# Altium PCB bottom board.PcbDoc
Units mm, origin at the board's own origin, x right, y up, seen from the top; angles counter-clockwise.
Board outline 190.66 x 105.54 mm, 2 copper layers (Top Layer, Bottom Layer); 93 components, 66 nets, 307 pads, 247 vias.
Unrouted connection lines stored in the file: 2.
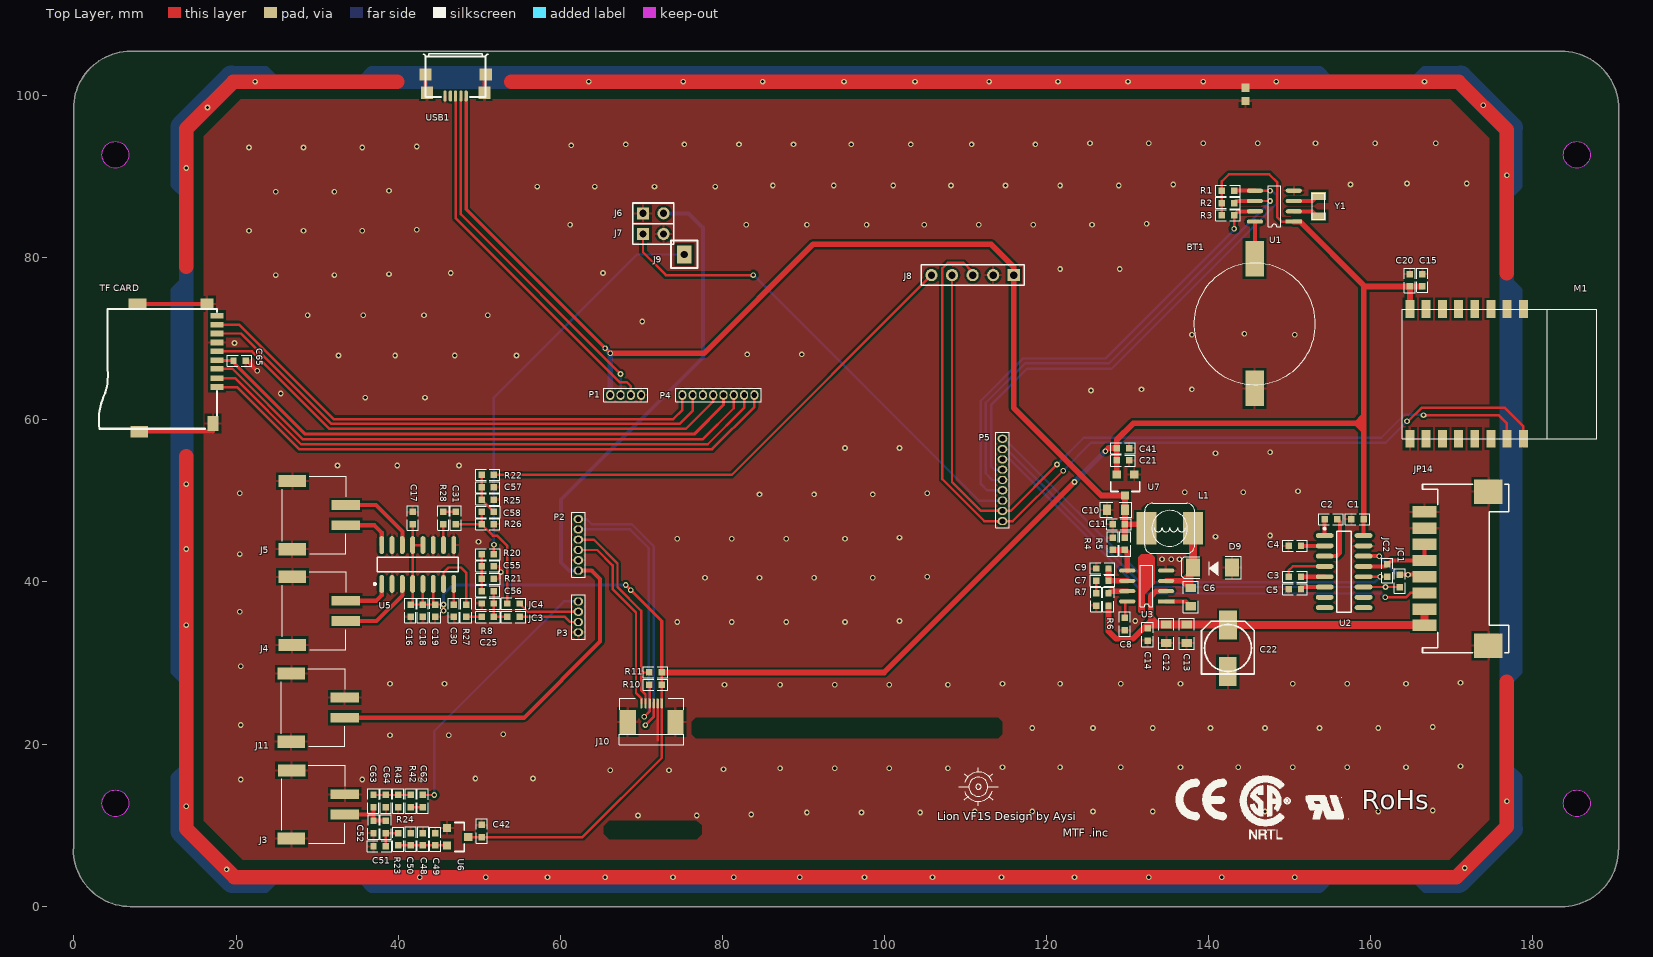
[diagram p0: Top Layer view]
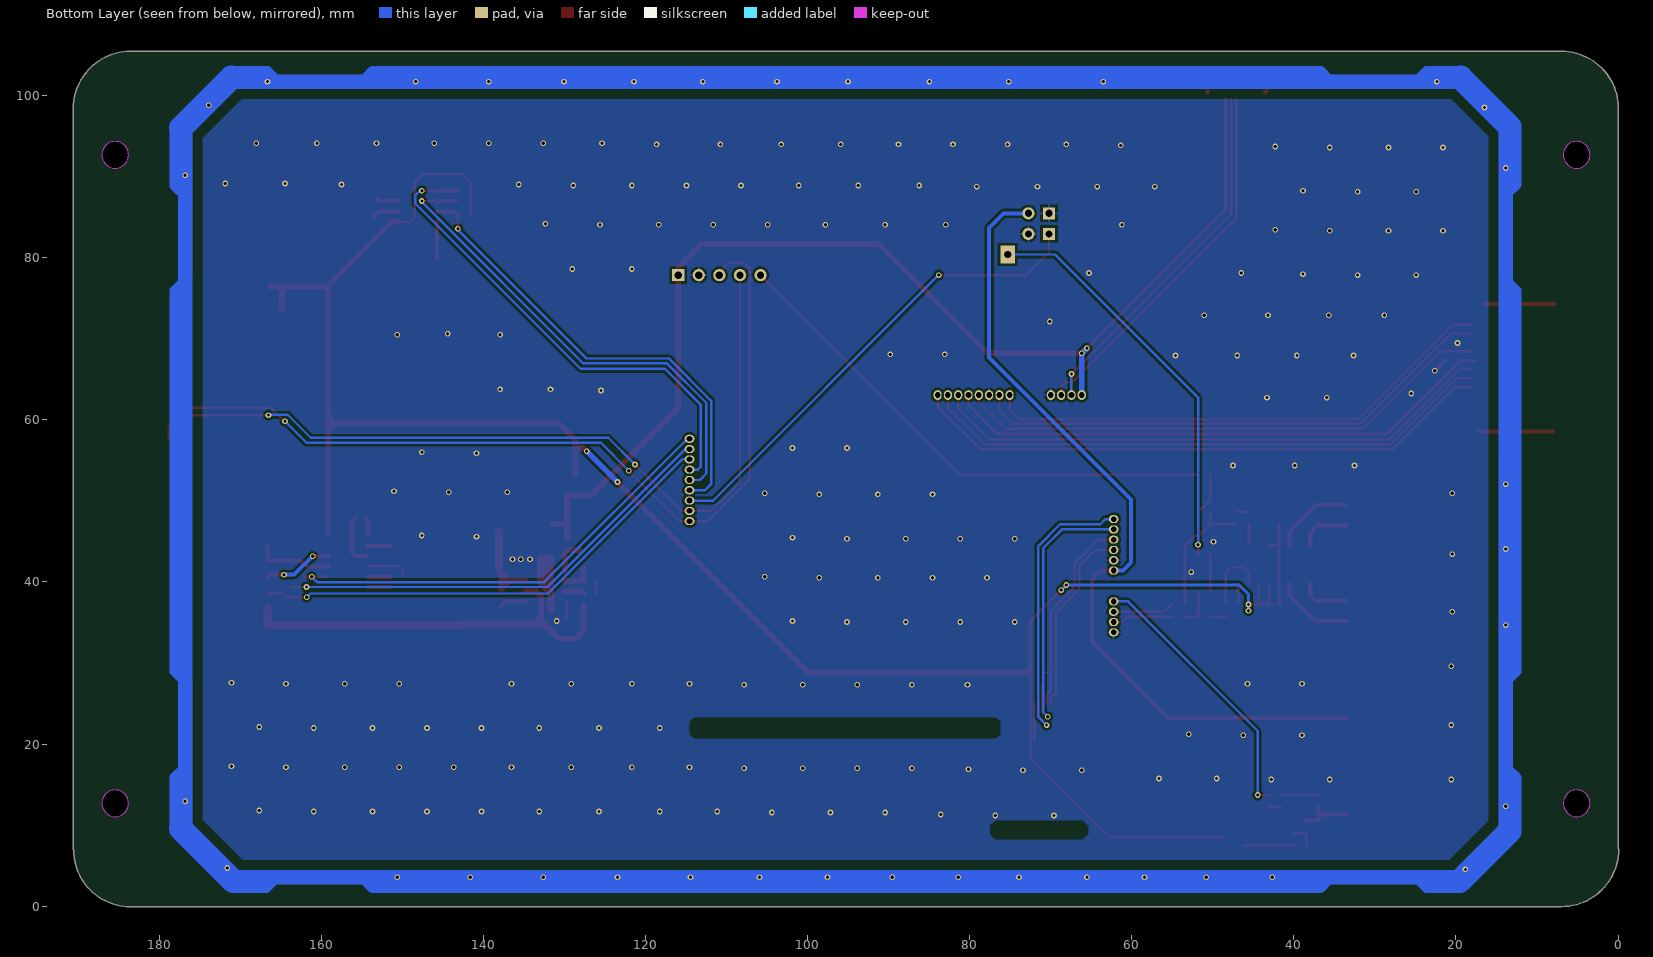
[diagram p1: Bottom Layer view, seen from below]

## Layer stack, top to bottom
Top Layer: signal copper 0.0356
Dielectric: core 0.32, FR-4, Dk 4.8
Bottom Layer: signal copper 0.0356

## Board outline
6.963,-0.052 cw(c6.985,7.012) -0.079,7.012 cw(c-0.015,7.012) -0.052,7.064 -0.052,98.4 cw(c7.012,98.4) 7.012,105.464 cw(c7.012,105.4) 7.044,105.455 183.487,105.455 cw(c183.515,105.398) 183.515,105.462 cw(c183.515,98.398) 190.579,98.398 cw(c190.515,98.398) 190.576,98.379 190.576,7 cw(c190.512,7) 190.552,6.95 cw(c183.488,6.985) 183.488,-0.079 cw(c183.488,-0.015) 183.46,-0.072 7.01,-0.072 cw(c7.01,-0.009)
cut-out: 5.112,91.042 cw(c5.112,92.692) 3.462,92.692 cw(c5.112,92.692) 5.112,94.342 cw(c5.112,92.692) 6.762,92.692 cw(c5.112,92.692)
cut-out: 5.112,11.042 cw(c5.112,12.692) 3.462,12.692 cw(c5.112,12.692) 5.112,14.342 cw(c5.112,12.692) 6.762,12.692 cw(c5.112,12.692)
cut-out: 185.412,11.042 cw(c185.412,12.692) 183.762,12.692 cw(c185.412,12.692) 185.412,14.342 cw(c185.412,12.692) 187.062,12.692 cw(c185.412,12.692)
cut-out: 185.412,91.042 cw(c185.412,92.692) 183.762,92.692 cw(c185.412,92.692) 185.412,94.342 cw(c185.412,92.692) 187.062,92.692 cw(c185.412,92.692)

## Design rules (kind name [scope] priority, off if disabled: settings)
Clearance [All] p1: gap=0.3
PolygonConnect PolygonConnect_1 [IsVia] p1: connectstyle=Direct reliefconductorwidth=0.254 reliefentries=4 polygonreliefangle="90 Angle"
PolygonConnect [All] p2: connectstyle=Relief reliefconductorwidth=0.3 reliefentries=4 polygonreliefangle="90 Angle"
RoutingVias [All] p1: holewidth=0.4 width=0.7 viastyle="Through Hole" minholewidth=0.4 minwidth=0.7 maxholewidth=0.711 maxwidth=1.27
SilkToSilkClearance [All] p1: silktosilkclearance=0
SilkscreenOverComponentPads [IsPad] p1: minsilkscreentomaskgap=0
SolderMaskExpansion [All] p1: expansion=0.102
TestPointUsage [All] p1: valid=0 allowmultiple=FALSE
Testpoint [(IsPad And (OnTopLayer Or OnBottomLayer))] p1: side=3 testpointundercomponent=TRUE minsize=1.016 maxsize=2.54 preferedsize=1.524 minholesize=0 maxholesize=1.016 preferedholesize=0.813 testpointgrid=0.025 style=297 order=0123456789
Width [All] p1: maxlimit=3 minlimit=0.254 preferedwidth=0.3
22 further rules are at their usual default settings.

## Components (designator, comment, footprint, x,y, rotation, side; value= is the part's Value field where it differs from the comment)
BT1 "Battery" CR1220 145.669,79.883 r0 top
C1 "100nF" 0603 157.607,47.752 r0 top
C2 "100nF" 0603 154.305,47.752 r0 top
C3 "100nF" 0603 149.86,40.64 r0 top
C4 "100nF" 0603 151.384,44.45 r180 top
C5 "100nF" 0603 149.86,39.116 r0 top
C6 "10nF" 0805 137.795,39.243 r270 top
C7 "3.9nF" 0603 127.635,40.132 r180 top
C8 "100nF" 0603 129.667,35.56 r270 top
C9 "NC" 0603 127.635,41.656 r180 top
C10 "22uF" 0805 129.667,48.895 r180 top
C11 "100nF" 0603 129.667,47.117 r180 top
C12 "22uF" 0805 134.767,34.712 r270 top
C13 "22uF" 0805 137.273,34.712 r270 top
C14 "100nF" 0603 132.461,34.29 r270 top
C15 "100nF" 0603 166.351,76.453 r90 top
C16 "10uF" 0603 41.529,37.211 r270 top
C17 "10uF" 0603 41.783,47.117 r90 top
C18 "10uF" 0603 43.053,37.211 r270 top
C19 "100nF" 0603 44.577,35.687 r90 top
C20 "10uF" 0603 164.827,77.977 r270 top
C21 "10uF" 0603 128.651,54.991 r0 top
C22 "100uF/35V" CAP_SMD_6.5MM 142.367,34.671 r90 top
C25 "1uF" 0603 50.292,35.687 r0 top
C30 "1uF" 0603 46.863,37.211 r270 top
C31 "1uF" 0603 47.117,48.64 r270 top
C41 "100nF" 0603 128.651,56.515 r0 top
C42 "100nF" 0603 50.292,8.509 r90 top
C48 "100nF" 0603 43.053,7.493 r90 top
C49 "10uF" 0603 44.577,9.017 r270 top
C50 "4.7uF" 0603 41.529,7.493 r90 top
C51 "4.7uF" 0603 38.481,7.366 r180 top
C52 "3.3nF" 0603 36.957,9.017 r90 top
C55 "33nf" 0603 51.816,41.91 r180 top
C56 "10uf" 0603 51.816,38.862 r180 top
C57 "33nf" 0603 51.816,51.689 r180 top
C58 "10uf" 0603 50.292,48.641 r0 top
C62 "100nF" 0603 43.053,13.716 r270 top
C63 "100nF" 0603 36.957,13.716 r270 top
C64 "1nF" 0603 38.481,12.192 r90 top
C65 "100nF" 0603 19.685,67.31 r0 top
D9 "SS34" SMA 142.875,41.783 r0 top
J3 "" 2PIN2.54-SMD 33.421,11.295 r90 top
J4 "" 2PIN2.54-SMD 33.528,35.179 r90 top
J5 "" 2PIN2.54-SMD 33.528,46.99 r90 top
J6 "Header 2" HDR1X2 70.206,85.471 r0 top locked
J7 "Header 2" HDR1X2 70.206,82.931 r0 top locked
J8 "Header 5" HDR1X5 115.951,77.851 r180 top locked
J9 "1PIN" 1PIN 75.311,80.391 r0 top locked
J10 "Header 7" FPC-6PIN 72.517,25.019 r180 top
J11 "" 2PIN2.54-SMD 33.401,23.241 r90 top
JC1 "0R" 0603 163.576,40.894 r270 top
JC2 "0R" 0603 162.052,42.164 r270 top
JC3 "0R" 0603 53.467,35.687 r0 top
JC4 "0R" 0603 53.467,37.338 r0 top
JP14 "DW-2.0/8P" DW2.0-8P-SMD 166.624,48.641 r90 top
L1 "10uH" LS8 138.049,46.609 r180 top
M1 "ESP-12S" ESP-12S 178.816,73.66 r270 top
P1 "USB" 4PIN1.27 66.167,63.055 r0 top locked
P2 "Header 6" 6PIN1.27 62.23,41.402 r90 top locked
P3 "MM" 4PIN1.27 62.23,33.782 r90 top locked
P4 "SD" 8PIN1.27 83.947,63.055 r180 top locked
P5 "Header 9" 9PIN1.27 114.554,47.498 r90 top locked
R1 "10K" 0603 141.605,88.265 r0 top
R2 "10K" 0603 143.129,86.741 r180 top
R3 "10K" 0603 143.129,85.217 r180 top
R4 "6.8K" 0603 128.143,43.942 r90 top
R5 "30K" 0603 129.667,43.942 r90 top
R6 "100K" 0603 127.635,38.608 r270 top
R7 "6.8K" 0603 126.111,37.084 r90 top
R8 "NC" 0603 50.292,37.338 r0 top
R10 "10K" 0603 72.517,27.305 r180 top
R11 "10K" 0603 72.517,28.829 r180 top
R20 "270R" 0603 50.292,43.434 r0 top
R21 "150R" 0603 50.292,40.386 r0 top
R22 "270R" 0603 51.816,53.213 r180 top
R23 "2K" 0603 40.005,9.017 r270 top
R24 "6.2K" 0603 38.481,10.541 r270 top
R25 "150R" 0603 51.816,50.165 r180 top
R26 "NC" 0603 51.816,47.117 r180 top
R27 "10K" 0603 48.387,37.211 r270 top
R28 "10K" 0603 45.574,47.116 r90 top
R42 "3.6K" 0603 41.529,12.192 r90 top
R43 "1K" 0603 40.005,12.192 r90 top
"TF CARD" "TF-15×15" SD_MICRO 17.78,66.294 r90 top
U1 "DS1302" SOP-8 150.495,84.455 r90 top
U2 "SP3232EEY-L/TR" SOIC-16 154.305,45.72 r270 top
U3 "MP2307" SOP-8 134.747,37.592 r90 top
U5 "PAM8403" SOIC-16 37.973,39.751 r0 top
U6 "XC6206-3.0V" SOT-23-3 48.641,8.509 r180 top
U7 "XC6206-3.3V" SOT-23-3 129.667,50.673 r90 top
USB1 "micro USBFemale" USB_MICRO 48.387,99.949 r180 top
Y1 "32.768K" SMD-3215 153.543,85.09 r90 top

## Footprints (in the part's own frame and the unit in brackets; to place one, negate y for a bottom-side part, rotate by r counter-clockwise, add the part's x,y. Pads: shape width x height; smd on the part's side, far side on the other; paste and mask are expansions set on the pad)
1PIN [mm]
  rect 1.8x2.2 hole 0.9: 1(0,0)
  silkscreen extent -1.68,-1.68 1.63,1.72
2PIN2.54-SMD [mm]
  rect 1.5x3.4 smd: 0(-2.95,6.6) 0(5.45,6.575)
  rect 1.2x3.5 smd: 1(0,0) 2(2.5,0)
  silkscreen extent -3.52,-0.05 6.07,7.8
4PIN1.27 [mm] "Connector; Header; 4 Position"
  oval 1x1.2 hole 0.7: 1(0,0) 2(1.27,0) 3(2.54,0) 4(3.81,0)
  silkscreen extent -0.82,-0.82 4.62,0.82
6PIN1.27 [mm] "Connector; Header; 6 Position"
  oval 1x1.2 hole 0.7: 1(0,0) 2(1.27,0) 3(2.54,0) 4(3.81,0) 5(5.08,0) 6(6.35,0)
  silkscreen extent -0.82,-0.82 7.17,0.82
8PIN1.27 [mm] "Connector; Header; 8 Position"
  oval 1x1.2 hole 0.7: 1(0,0) 2(1.27,0) 3(2.54,0) 4(3.81,0) 5(5.08,0) 6(6.35,0) 7(7.62,0) 8(8.89,0)
  silkscreen extent -0.82,-0.82 9.72,0.82
9PIN1.27 [mm] "Connector; Header; 9 Position"
  oval 1x1.2 hole 0.7: 1(0,0) 2(1.27,0) 3(2.54,0) 4(3.81,0) 5(5.08,0) 6(6.35,0) 7(7.62,0) 8(8.89,0) 9(10.16,0)
  silkscreen extent -0.82,-0.82 10.97,0.82
0603 [mm]
  rect 0.8x0.8 smd: 1(0,0) 2(1.524,0)
  silkscreen extent -0.74,-0.7 2.27,0.68, body extent 0,-0.4 1.53,0.4, height 1
0805 [mm]
  rect 1x1.3 smd: 1(-0.02,-0.002) 2(2.241,-0.002)
  silkscreen extent -0.81,-0.93 3.03,0.94, body extent 0,-0.55 2.25,0.55, height 1
CAP_SMD_6.5MM [mm]
  rect 3.6x2.2 smd: 1(0,0) 2(-5.73,0.01)
  silkscreen extent -6.02,-3.26 0.48,3.24, body extent -6.05,-3.22 0.44,3.25, height 6
CR1220 [mm]
  rect 2.3x4.4 smd: 1(0,0) 2(0,-16)
  silkscreen extent -7.5,-15.55 7.5,-0.55
DW2.0-8P-SMD [mm]
  rect 3x3.5 smd: 0(-16.5,-7.881) 0(2.5,-7.881)
  rect 1.4x3 smd: 1(0,0) 2(-2,0) 3(-4,0) 4(-6,0) 5(-8,0) 6(-10,0) 7(-12,0) 8(-14,0)
  silkscreen extent -17.4,-10.38 3.43,0.25
ESP-12S [mm]
  rect 2.2x1.1 smd: 1(0,0) 2(0,-2) 3(0,-4) 4(0,-6) 5(0,-8) 6(0,-10) 7(0,-12) 8(0,-14) 9(16,-14) 10(16,-12) 11(16,-10) 12(16,-8) 13(16,-6) 14(16,-4) 15(16,-2) 16(16,0)
  silkscreen extent 0,-14.95 16,9.05
FPC-6PIN [mm]
  oval 0.3x1.25 smd: 1(0,0) 2(0.5,0) 3(1,0) 4(1.5,0) 5(2,0) 6(2.5,0)
  rect 2x3 smd: 7(-1.7,2.3) 7(4.2,2.3)
  silkscreen extent -2.7,-0.63 5.23,5.13
HDR1X2 [mm] "Connector; Header; 2 Position"
  rect 1.5x1.5 hole 0.9: 1(0,0)
  round 1.5 hole 0.9: 2(2.54,0)
  silkscreen extent -1.27,-1.27 3.81,1.27
HDR1X5 [mm] "Connector; Header; 5 Position"
  rect 1.5x1.5 hole 0.9: 1(0,0)
  round 1.5 hole 0.9: 2(2.54,0) 3(5.08,0) 4(7.62,0) 5(10.16,0)
  silkscreen extent -1.27,-1.27 11.43,1.27
LS8 [mm]
  rect 2.5x4 smd: 1(0,0) 2(5.74,0)
  silkscreen extent -0.23,-3.1 5.97,3.1
SD_MICRO [mm]
  rect 0.7x1.6 smd: 1(-2.25,0.127) 2(-1.151,0.127) 3(0,0.127) 4(1.049,0.127) 5(2.149,0.127) 6(3.251,0.127) 7(4.351,0.127) 8(5.451,0.127) 9(6.551,0.127)
  rect 1.4x1.6 smd: 10(8.001,1.377)
  rect 1.4x2.2 smd: 11(8.001,9.926) 13(-7.75,9.728)
  rect 1.8x1.4 smd: 12(-6.749,0.627)
  silkscreen extent -7.4,0.13 7.4,14.7, body extent -7.45,0.08 7.4,14.6, height 1.5
SMA [mm]
  rect 1.7x2.2 smd: 1(0,0) 2(-4.82,0)
  silkscreen extent -6.22,-1.39 1.15,1.4, body extent -4.82,-1.2 0,1.2, height 2
SMD-3215 [mm]
  rect 1x1.8 smd: 1(0,0) 2(2.5,0)
  silkscreen extent -0.35,-0.75 2.85,0.75
SOIC-16 [mm]
  oval 0.6x2.2 smd: 1(0,0) 2(1.27,0) 3(2.54,0) 4(3.81,0) 5(5.08,0) 6(6.35,0) 7(7.62,0) 8(8.89,0) 9(8.89,4.8) 10(7.62,4.8) 11(6.35,4.8) 12(5.08,4.8) 13(3.81,4.8) 14(2.54,4.8) 15(1.27,4.8) 16(0,4.8)
  silkscreen extent -0.97,-0.12 9.45,3.3, body extent -0.51,0.45 9.4,4.35, height 1.75
SOP-8 [mm]
  rect 0.51x2 smd: 1(0,0)
  oval 0.51x2 smd: 2(1.27,0) 3(2.54,0) 4(3.81,0) 5(3.81,4.8) 6(2.54,4.8) 7(1.27,4.8) 8(0,4.8)
  silkscreen extent -0.64,1.64 4.44,3.17, body extent -0.63,0.67 4.47,4.13, height 1.5
SOT-23-3 [mm]
  rect 1x1 smd: 1(0,0) 2(2.598,-1.143) 3(2.598,1.016)
  silkscreen extent 0.49,-1.82 1.66,1.75, body extent 0.48,-1.8 2.07,1.75, height 1
USB_MICRO [mm]
  rect 1.5x1.5 smd: 0(-2.423,-2.659) 0(-2.248,-0.409) 0(4.827,-0.409) 0(5.002,-2.634)
  oval 0.4x1.35 smd: 1(0,0) 2(0.65,0) 3(1.3,0) 4(1.95,0) 5(2.6,0)
  silkscreen extent -2.7,-5.2 5.3,0.15

## Part data
BT1: "Multicell Battery"
C1 C2 C3 C4 C5 C6 C7 C8 C9 C10 C11 C12 C13 C14 C15 C16 C17 C18 C19 C20 C21 C25 C30 C31 C50 C51 C52 C62 C63 C64 C65: library part CAP, "Capacitor"
C22: library part ELECTRO1_W
C41 C42 C48 C49: library part Cap, "Capacitor"
C55 C56 C57 C58: library part CAP_W
D9: library part Diode, "Diode"
J3 J4 J5 J11: library part CON2, "Connector"
J6 J7: "Header, 2-Pin"
J8: "Header, 5-Pin"
J10: "Header, 7-Pin"
L1: library part Inductor, "Inductor"
P1 P3: library part "Header 4", "Header, 4-Pin"
P2: "Header, 6-Pin"
P4: library part "Header 8", "Header, 8-Pin"
P5: "Header, 9-Pin"
R1 R2 R3 R4 R5 R6 R7 R10 R11 R23 R24 R27 R28 R42 R43: library part RES2
R8 R20 R21 R22 R25 R26: library part Res2, "Resistor"
U2: "RS232"
U5: library part SC8403
U6 U7: library part XC6206
Y1: library part XTAL, "Crystal Oscillator"

## Free pads (board coordinates)
  rect 1x1 smd: 0(144.526,99.314) 1(144.526,100.965)

## Via types
v1: diameter 0.7, hole 0.4, Top Layer to Bottom Layer, tented both sides, 247 vias

## Nets (pads, with @x,y where several pads share a name; then routed paths per layer and width w, separated by ;. In a path a pad name is that pad's centre, name@x,y a point inside that pad or via, vN(x,y) a via of type N, cw(c..) or ccw(c..) an arc to the next point about the centre after c; other vN are vias at no path point)
3V3: C1.2 C15.1 C16.1 C17.1 C18.1 C19.2 C20.2 C21.1 C41.1 C42.1 J10.1 M1.8 R1.1 R2.2 R3.2 R10.1 R11.1 U1.1 U2.16 U5.4 U5.5 U5.6 U5.12 U5.13 U6.1 U7.3 | length 273.9
  Top Layer w0.3: C16.1 C19.2 v1(45.593,37.211) ; C16.1@41.783,37.465 U5.4 U5.13 ; C17.1 U5.13 ; C18.1 U5.5 ; U5.12 U5.13 ; C19.2@44.323,37.465 U5.6 ; U6.1 C42.1@50.165,8.509 ; C42.1 62.738,8.509 72.517,18.288 J10.1 R10.1 R11.1 ; v1@68.072,39.497 v1(68.072,39.624) ; R3.2 R2.2 R1.1 141.605,89.408 142.494,90.297 147.447,90.297 148.463,89.281 148.463,84.963 148.971,84.455 U1.1
  Top Layer w0.4: v1(45.593,36.449) v1(45.593,37.211) ; v1(68.072,39.624) 72.517,35.179 R11.1
  Top Layer w0.5: U2.16 C1.2@159.105,47.472
  Top Layer w0.7: R11.1 99.949,28.829 v1(123.444,52.324) ; v1(127.254,56.134) 127.635,56.515 C41.1 ; U7.3 128.651,56.134 128.651,57.531 130.683,59.563 158.242,59.563 ; U1.1 151.257,84.455 159.131,76.581 C1.2 ; 159.131,58.674 158.242,59.563 ; 159.131,59.563 158.242,59.563 ; 159.131,60.452 158.242,59.563 ; 159.385,76.454 161.417,76.454 C15.1@166.351,76.454 ; M1.8@164.827,73.671 C20.2
  Bottom Layer w0.4: v1(45.593,36.449) 45.593,38.481 46.736,39.624 59.309,39.624 ; 58.801,39.624 58.813,39.624 ; 59.321,39.636 59.309,39.624 ; v1(68.707,38.989) v1(68.072,39.624) 59.309,39.624
  Bottom Layer w0.7: v1(123.444,52.324) v1(127.254,56.134)
5V: C10.1 C11.1 J8.1 L1.2 P1.1 R5.2 U7.1 USB1.1 | length 143.7
  Top Layer w0.4: USB1.1@48.387,99.568 48.387,98.044 48.387,85.979 v1(65.532,68.834) v1(66.167,68.199)
  Top Layer w0.7: v1(66.167,68.199) 77.724,68.199 91.186,81.661 113.157,81.661 115.951,78.867 115.951,61.468 126.746,50.673 U7.1 ; R5.2 C11.1 ; U7.1@129.667,50.546 C11.1 ; L1.2@131.42,47.117 C11.1
  Bottom Layer w0.7: v1(65.532,68.834) v1(66.167,68.199) P1.1
BUSY: JP14.6 P5.7 | length 59.9
  Top Layer w0.3: v1(161.777,38.121) 161.798,38.1 164.338,38.1 164.879,38.641 JP14.6 JP14.6@166.21,38.227
  Bottom Layer w0.3: P5.7 115.483,55.118 132.031,38.57 161.328,38.57 v1(161.777,38.121)
CTP_INT: J10.6 P2.3 | length 23.5
  Top Layer w0.3: P2.3 62.404,43.942 64.556,43.942 66.456,42.042 66.456,39.889 66.456,39.121 69.342,36.235 69.342,27.432 69.342,26.289 70.017,25.614 J10.6
CTP_RET: J10.3 P2.6 | length 36.3
  Top Layer w0.3: v1(70.501,22.336) 71.517,23.352 J10.3
  Bottom Layer w0.3: P2.6 63.246,47.752 63.881,47.117 68.834,47.117 71.517,44.434 71.517,23.352 v1(70.501,22.336)
CTP_SCL: J10.4 P2.5 R10.2 | length 34.9
  Top Layer w0.3: v1(70.358,23.368) 71.017,24.027 J10.4 71.017,27.281 R10.2
  Bottom Layer w0.3: P2.5 68.615,46.482 70.917,44.18 70.917,23.927 v1(70.358,23.368)
CTP_SDA: J10.5 P2.4 R11.2 | length 26.5
  Top Layer w0.3: P2.4 64.135,45.212 67.056,42.291 67.056,39.37 69.977,36.449 69.977,27.813 69.977,26.67 70.517,26.13 J10.5 ; 69.977,28.575 70.231,28.829 ; 69.977,28.829 70.231,28.829 ; 69.977,29.083 70.231,28.829 ; R11.2 70.231,28.829
CVBS: J6.2 J11.1 P2.1 | length 102.9
  Top Layer w0.5: J11.1 53.213,23.241 55.499,23.241 64.897,32.639 64.897,40.386 63.881,41.402 P2.1
  Bottom Layer w0.5: P2.1 61.087,41.402 60.071,42.418 60.071,50.165 64.897,54.991 77.597,67.691 77.597,83.693 75.819,85.471 J6.2
GND: "TF CARD.6" "TF CARD.10" "TF CARD.11" "TF CARD.12" "TF CARD.13" BT1.2 C1.1 C4.2 C5.1 C8.2 C9.2 C10.2 C11.2 C12.2 C13.2 C14.2 C15.2 C16.2 C17.2 C18.2 C19.1 C20.1 C21.2 C22.2 C30.2 C41.2 C42.2 C48.2 C49.1 C50.2 C51.2 C52.1 C55.1 C57.1 C64.1 C65.2 D9.1 J3.0 J3.2 J4.0 J5.0 J6.1 J7.2 J8.2 J10.2 J10.7 J11.0 J11.2 JP14.0 JP14.1 JP14.2 M1.9 P1.4 P2.2 P3.1 P4.6 pad.0 R4.2 R7.1 R8.1 R21.2 R25.1 R26.1 R43.1 U1.4 U2.15 U3.4 U5.2 U5.9 U5.11 U5.15 U6.2 U7.2 USB1.0 USB1.5 | length 29.9
  Top Layer w0.3: 52.516,40.536 52.516,41.76 ; 72.009,20.447 72.017,20.455 J10.2
  Top Layer w0.5: 7.854,74.295 11.938,74.295 16.403,74.295 ; 8.052,58.544 12.065,58.544 17.142,58.544 17.145,58.547 ; C65.2@21.336,67.31 v1(22.606,66.04) ; USB1.0@43.385,102.583 43.385,100.533 USB1.0@43.56,100.358 ; USB1.0@50.635,100.358 50.635,102.433 USB1.0@50.81,102.608
  other v1: 69.596,11.176 76.835,11.176 83.566,11.303 90.424,11.557 97.155,11.557 104.394,11.557 111.125,11.684 118.237,11.684 125.73,11.684 133.096,11.684 140.208,11.684 146.939,11.684 153.67,11.684 160.909,11.684 167.64,11.811 20.574,15.621 35.56,15.621 42.799,15.621 49.53,15.748 56.642,15.748 66.167,16.764 73.406,16.764 80.137,16.891 87.122,17.018 93.853,17.018 100.584,17.018 107.823,17.018 114.554,17.145 121.666,17.145 129.159,17.145 136.525,17.145 143.637,17.145 150.368,17.145 157.099,17.145 164.338,17.145 171.069,17.272 38.989,21.082 46.228,21.082 52.959,21.209 118.237,21.971 125.73,21.971 133.096,21.971 140.208,21.971 146.939,21.971 153.67,21.971 160.909,21.971 167.64,22.098 20.574,22.352 80.264,27.305 87.122,27.305 93.853,27.305 100.584,27.305 107.823,27.305 38.989,27.432 45.72,27.432 114.554,27.432 121.666,27.432 129.159,27.432 136.525,27.432 150.368,27.432 157.099,27.432 164.338,27.432 171.069,27.559 20.574,29.591 74.422,35.052 81.153,35.052 87.884,35.052 95.123,35.052 101.854,35.179 130.937,35.179 20.447,36.322 77.851,40.513 84.582,40.513 91.313,40.513 98.552,40.513 105.283,40.64 52.643,41.21 134.239,42.799 135.382,42.799 136.398,42.799 20.447,43.434 49.911,44.958 74.422,45.339 81.153,45.339 87.884,45.339 95.123,45.339 101.854,45.466 140.843,45.593 147.574,45.72 84.582,50.8 91.313,50.8 98.552,50.8 20.447,50.927 105.283,50.927 137.033,51.054 144.272,51.054 151.003,51.181 32.512,54.356 39.878,54.356 47.498,54.356 140.843,55.88 147.574,56.007 95.123,56.515 101.854,56.515 35.941,62.738 43.307,62.738 25.527,63.246 125.476,63.627 131.699,63.754 137.922,63.754 32.639,67.945 39.624,67.945 46.99,67.945 54.61,67.945 83.058,68.072 89.789,68.072 19.812,69.469 137.922,70.485 150.622,70.485 144.399,70.612 70.104,72.136 28.829,72.898 35.687,72.898 43.18,72.898 51.054,72.898 24.892,77.851 32.131,77.851 38.862,77.978 46.482,78.105 65.278,78.105 121.666,78.613 129.032,78.613 21.59,83.312 28.321,83.312 35.56,83.312 42.291,83.439 61.214,84.074 82.931,84.074 90.424,84.074 97.79,84.074 104.902,84.074 111.633,84.074 118.364,84.074 125.603,84.074 132.334,84.201 24.892,88.138 32.131,88.138 38.862,88.265 57.15,88.773 64.262,88.773 71.628,88.773 79.121,88.773 86.233,88.9 93.726,88.9 101.092,88.9 108.204,88.9 114.935,88.9 121.666,88.9 128.905,88.9 135.636,89.027 157.48,89.027 164.465,89.154 171.831,89.154 21.59,93.599 28.321,93.599 35.56,93.599 42.291,93.726 61.341,93.853 68.072,93.98 75.311,93.98 82.042,93.98 88.773,93.98 95.885,93.98 103.251,93.98 110.744,93.98 118.618,93.98 125.349,94.107 132.588,94.107 139.319,94.107 146.05,94.107 153.162,94.107 160.528,94.107 168.021,94.107
GPIO18: J8.5 R22.1 | length 64.2
  Top Layer w0.3: R22.1 81.153,53.213 J8.5
GPIO19: J9.1 R20.2 | length 50.1
  Top Layer w0.3: R20.2 v1(51.816,44.577)
  Bottom Layer w0.3: v1(51.816,44.577) 51.816,62.738 69.469,80.391 J9.1
HPL: C25.2 C56.1 JC3.1 JC3.2 P3.2 R8.2 | length 12.3
  Top Layer w0.3: C56.1 R8.2 C25.2 JC3.1 ; JC3.2 60.579,35.687 61.214,35.052 P3.2
HPR: C31.2 C58.1 JC4.1 JC4.2 P3.3 R26.2 | length 23.8
  Top Layer w0.3: C31.2 R26.2 ; C58.1 R26.2 ; JC4.1 53.467,44.45 52.197,45.72 51.689,45.72 R26.2 ; JC4.2 56.007,36.322 P3.3
MICIN: C62.1 P3.4 | length 33.7
  Top Layer w0.3: C62.1 v1(44.45,13.716)
  Bottom Layer w0.3: v1(44.45,13.716) 44.45,21.59 60.452,37.592 P3.4
NetBT1_1: BT1.1 U1.8 | length 4.5
  Top Layer w0.5: BT1.1@145.695,79.909 U1.8
NetC2_1: C2.1 U2.1 | length 2
  Top Layer w0.5: U2.1 C2.1
NetC2_2: C2.2 U2.3 | length 6.4
  Top Layer w0.5: U2.3 155.829,43.18 156.21,43.561 156.21,47.371 C2.2
NetC3_1: C3.1 U2.4 | length 5.4
  Top Layer w0.3: C3.1 149.86,41.402 150.368,41.91 U2.4
NetC3_2: C3.2 U2.5 | length 2.9
  Top Layer w0.5: C3.2 U2.5
NetC4_1: C4.1 U2.2 | length 2.9
  Top Layer w0.5: C4.1 U2.2
NetC5_2: C5.2 U2.6 | length 2.9
  Top Layer w0.5: C5.2@151.384,39.37 U2.6
NetC6_1: C6.1 D9.2 L1.1 U3.3 | length 12.5
  Top Layer w0.7: U3.3 136.779,40.132 137.795,39.116 137.795,41.142 136.785,40.132 137.541,40.132
  Top Layer w1: D9.2@138.055,41.402 L1.1@138.055,46.222
NetC6_2: C6.2 U3.1 | length 3.3
  Top Layer w0.5: U3.1 137.203,37.592 C6.2
NetC7_1: C7.1 C9.1 U3.6 | length 3.8
  Top Layer w0.7: C9.1 C7.1 U3.6
NetC7_2: C7.2 R7.2 | length 1.5
  Top Layer w0.3: R7.2 C7.2
NetC8_1: C8.1 U3.8 | length 2
  Top Layer w0.3: C8.1@129.693,35.586 U3.8@129.693,37.592
NetC25_1: C25.1 R27.2 | length 1.9
  Top Layer w0.3: R27.2 C25.1
NetC30_1: C30.1 U5.8 | length 2.5
  Top Layer w0.3: C30.1 U5.8
NetC31_1: C31.1 R28.2 | length 1.5
  Top Layer w0.3: R28.2 C31.1
NetC51_1: C51.1 R23.1 R24.2 | length 3.2
  Top Layer w0.3: C51.1 R24.2 R23.1
NetC52_2: C52.2 C63.2 J3.1 R24.1 | length 6.9
  Top Layer w0.5: J3.1 36.949,11.295 ; C63.2@36.949,12.184 36.949,11.295 ; C52.2@37.084,10.668 C52.2 ; R24.1 C52.2 ; 36.949,11.295 36.957,11.303 C52.2
NetC55_2: C55.2 C56.2 R20.1 R21.1 | length 4.6
  Top Layer w0.3: C56.2 R21.1 C55.2 R20.1
NetC57_2: C57.2 C58.2 R22.2 R25.2 | length 5.2
  Top Layer w0.3: R22.2 C57.2 R25.2 C58.2
NetC62_2: C62.2 R42.1 | length 1.5
  Top Layer w0.3: R42.1 C62.2
NetC63_1: C63.1 C64.2 R42.2 R43.2 | length 4.6
  Top Layer w0.3: C63.1 C64.2 R43.2 R42.2
NetJ4_1: J4.1 U5.3 | length 9.7
  Top Layer w0.5: J4.1 37.338,35.179 40.513,38.354 U5.3
NetJ4_2: J4.2 U5.1 | length 6.1
  Top Layer w0.5: J4.2 37.298,37.679 37.973,38.354 U5.1
NetJ5_1: J5.1 U5.16 | length 6.4
  Top Layer w0.5: J5.1 37.084,46.99 37.973,46.101 U5.16
NetJ5_2: J5.2 U5.14 | length 10
  Top Layer w0.5: J5.2 37.251,49.49 40.513,46.228 U5.14
NetR4_1: R4.1 R5.1 U3.5 | length 4.2
  Top Layer w0.7: R4.1 R5.1 129.947,43.662 U3.5
NetR6_1: R6.1 U3.7 | length 2.4
  Top Layer w0.7: R6.1 127.889,38.862 U3.7
NetR27_1: R27.1 U5.7 | length 8.7
  Top Layer w0.3: U5.7 45.593,41.148 46.228,41.783 47.752,41.783 48.387,41.148 R27.1
NetR28_1: R28.1 U5.10 | length 2.5
  Top Layer w0.3: U5.10@45.574,44.57 R28.1
NetU1_2: U1.2 Y1.1 | length 3.4
  Top Layer w0.5: U1.2 152.781,85.725 Y1.1@153.543,84.963
NetU1_3: U1.3 Y1.2 | length 2.8
  Top Layer w0.5: U1.3 152.781,86.995 Y1.2@153.162,87.376
"POWER INPUT": C12.1 C13.1 C14.1 C22.1 JP14.7 JP14.8 R6.2 U3.2 | length 53.1
  Top Layer w0.7: R6.2 127.635,33.909 128.558,32.986 130.649,32.986 131.953,34.29 ; C14.1 131.953,34.29 ; 132.903,34.991 132.842,35.052 132.842,35.687 ; 133.477,34.732 133.477,35.052 132.842,35.687 ; U3.2 133.477,38.862 132.842,38.227 132.842,35.687 ; 131.953,34.29 132.842,35.179 132.842,35.687
  Top Layer w1: 132.903,34.732 133.477,34.732 C12.1 C13.1 142.306,34.732 C22.1 166.527,34.671 166.624,34.768 JP14.7@166.624,36.768
"RS RX": JC2.1 JP14.3 JP14.4 U2.13 | length 9.8
  Top Layer w0.5: U2.13 161.798,41.91 JC2.1 162.529,42.641 164.307,42.641 JP14.4 JP14.3
"RS TX": JC1.1 JP14.5 U2.14 | length 9.6
  Top Layer w0.5: U2.14 v1(161.036,43.18) ; JC1.1 v1(164.592,40.894) 166.371,40.894 JP14.5
  Bottom Layer w0.5: v1(161.036,43.18) 163.322,40.894 v1(164.592,40.894)
RST: P5.6 R1.2 U1.5 | length 61.2
  Top Layer w0.3: U1.5 v1(147.574,88.265)
  Top Layer w0.5: R1.2 U1.5
  Bottom Layer w0.3: P5.6 113.538,53.848 113.157,54.229 113.157,61.849 117.602,66.294 128.004,66.294 148.374,86.664 148.374,87.719 147.828,88.265 v1(147.574,88.265)
RUN: J7.1 P5.3 | length 59.3
  Top Layer w0.3: J7.1 70.206,80.67 73.025,77.851 v1(83.82,77.851)
  Bottom Layer w0.3: v1(83.82,77.851) 111.633,50.038 P5.3
RX: JC2.2 P5.9 U2.12 | length 57.2
  Top Layer w0.3: U2.12 v1(161.163,40.64) JC2.2
  Bottom Layer w0.3: P5.9 114.808,57.658 132.496,39.97 160.493,39.97 v1(161.163,40.64)
RX2: J8.4 M1.15 P5.2 | length 102.7
  Top Layer w0.3: J8.4 108.331,52.324 111.887,48.768 P5.2 115.57,48.768 v1(121.285,54.483) ; v1(166.497,60.579) 175.768,60.579 176.784,59.563 176.784,57.692 M1.15
  Bottom Layer w0.3: v1(121.285,54.483) 124.587,57.785 161.29,57.785 164.122,60.617 166.459,60.617 v1(166.497,60.579)
SCL: P5.4 R3.1 U1.7 | length 57.8
  Top Layer w0.3: v1@143.002,83.566 143.129,83.693 R3.1
  Top Layer w0.5: R3.1 143.637,85.725 U1.7
  Bottom Layer w0.3: P5.4 112.649,51.308 111.887,52.07 111.887,62.357 117.094,67.564 127.254,67.564 143.002,83.312 v1@143.002,83.566
  other v1: 143.129,83.566
SD_VCC: "TF CARD.4" C65.1 P4.4 | length 69
  Top Layer w0.4: 17.653,67.343 17.686,67.31 19.461,67.31 28.533,58.238 76.526,58.238 80.137,61.849 P4.4
SDA: P5.5 R2.1 U1.6 | length 60.8
  Top Layer w0.3: U1.6 v1(147.574,86.995)
  Top Layer w0.5: R2.1@143.383,86.995 U1.6
  Bottom Layer w0.3: P5.5 113.284,52.578 112.487,53.375 112.487,62.108 117.343,66.964 127.67,66.964 v1@147.637,86.931
SDC0_CLK: "TF CARD.5" P4.5 | length 67
  Top Layer w0.3: 18.034,68.443 21.981,68.443 31.536,58.888 75.485,58.888 78.867,62.27 P4.5
SDC0_CMD: "TF CARD.3" P4.3 | length 70.2
  Top Layer w0.3: 18.034,66.294 19.558,66.294 28.264,57.588 77.567,57.588 81.407,61.428 P4.3
SDC0_D0: "TF CARD.7" P4.7 | length 65.5
  Top Layer w0.3: 18.034,70.645 20.628,70.645 31.785,59.488 74.728,59.488 76.327,61.087 P4.7
SDC0_D1: "TF CARD.8" P4.8 | length 64.2
  Top Layer w0.3: 18.034,71.745 20.376,71.745 32.033,60.088 73.931,60.088 75.057,61.214 P4.8
SDC0_D2: "TF CARD.1" P4.1 | length 72.7
  Top Layer w0.3: 18.034,64.044 20.111,64.044 27.767,56.388 78.74,56.388 83.947,61.595 P4.1
SDC0_D3: "TF CARD.2" P4.2 | length 71.5
  Top Layer w0.3: 18.034,65.143 19.86,65.143 28.015,56.988 78.197,56.988 82.677,61.468 P4.2
TX: JC1.2 P5.8 U2.11 | length 58.8
  Top Layer w0.3: U2.11 v1(161.798,39.37) JC1.2
  Bottom Layer w0.3: P5.8 115.062,56.388 132.08,39.37 v1(161.798,39.37)
TX2: J8.3 M1.16 P5.1 | length 113
  Top Layer w0.3: J8.3 110.871,78.232 109.728,79.375 107.823,79.375 107.131,78.683 107.131,52.675 112.308,47.498 P5.1 115.824,47.498 v1(122.047,53.721) ; v1(164.465,59.817) 164.604,59.817 166.255,61.468 176.53,61.468 178.816,59.182 M1.16
  Bottom Layer w0.3: v1(122.047,53.721) 125.511,57.185 161.833,57.185 v1(164.465,59.817)
USB_DM: P1.2 USB1.2 | length 44.7
  Top Layer w0.3: USB1.2@47.737,99.568 47.737,85.359 v1(67.437,65.659)
  Bottom Layer w0.3: P1.2 v1(67.437,65.659)
USB_DP: P1.3 USB1.3 | length 46.2
  Top Layer w0.3: USB1.3@47.087,99.568 47.087,84.878 67.322,64.643 68.199,64.643 68.707,64.135 P1.3 P1.3@68.707,63.229
VCC3.0V: C48.1 C49.2 C50.1 R23.2 U6.3 | length 6
  Top Layer w0.3: R23.2 C50.1 C48.1 C49.2 U6.3
pads on no net: "TF CARD.9" M1.1 M1.2 M1.3 M1.4 M1.5 M1.6 M1.7 M1.10 M1.11 M1.12 M1.13 M1.14 U2.7 U2.8 U2.9 U2.10 USB1.4
copper on no net: | length 1336
  Top Layer w1.8: 13.843,55.499 13.843,9.525 19.812,3.556 170.561,3.556 176.784,9.779 176.784,27.686 ; 13.843,78.867 13.843,95.885 19.685,101.727 39.878,101.727 ; 53.975,101.727 170.815,101.727 ; 176.784,78.105 176.784,95.758 ; 170.815,101.727 176.784,95.758 ; 170.815,101.727 176.784,95.758
  Bottom Layer w1.1: 12.446,9.398 12.446,15.875 13.589,17.018 ; 12.446,96.012 12.446,89.027 13.716,87.757 ; 13.589,77.089 12.446,75.946 12.446,28.956 13.716,27.686 13.843,27.686 ; 19.304,103.124 23.622,103.124 24.638,102.108 ; 19.685,2.159 23.622,2.159 24.892,3.429 24.892,3.556 ; 35.687,3.175 36.703,2.159 153.67,2.159 155.067,3.556 ; 35.687,102.108 36.703,103.124 153.67,103.124 154.686,102.108 154.686,101.981 ; 165.608,102.108 166.624,103.124 170.688,103.124 ; 165.735,3.175 166.751,2.159 170.688,2.159 ; 177.038,17.272 177.038,17.018 178.181,15.875 178.181,9.271 178.054,9.144 ; 177.038,76.962 177.165,76.962 178.181,75.946 178.181,28.956 177.165,27.94 ; 177.419,88.138 178.181,88.9 178.181,96.012
  Bottom Layer w1.8: 13.843,9.779 13.843,96.139 ; 19.812,101.727 170.688,101.727 ; 19.939,3.556 170.561,3.556 ; 176.784,9.271 176.784,96.266
  Bottom Layer w2.9: 13.335,9.271 19.558,3.048 ; 13.335,96.139 19.431,102.235 ; 170.815,3.048 177.292,9.525 ; 171.069,102.235 177.292,96.012
  other v1: 42.672,3.556 50.8,3.556 58.42,3.556 65.532,3.556 73.914,3.556 81.407,3.556 89.535,3.556 97.536,3.556 105.918,3.556 114.427,3.556 123.444,3.556 132.588,3.556 141.605,3.556 150.622,3.556 18.833,4.535 171.577,4.699 13.843,12.319 176.784,12.954 13.843,34.671 13.843,44.069 13.843,52.07 176.784,90.17 13.843,91.059 16.486,98.528 173.863,98.806 22.352,101.727 63.5,101.727 75.184,101.727 84.963,101.727 94.996,101.727 103.759,101.727 112.903,101.727 121.412,101.727 130.048,101.727 139.319,101.727 148.336,101.727 166.624,101.727

## Polygon pours and split planes (outlines as drawn)
GND on Top Layer "Top Layer-No Net" (solid, remove dead copper, pour order 1000): 169.799,99.568 174.625,94.742 174.625,10.668 169.672,5.715 20.828,5.715 16.002,10.541 16.002,94.996 20.574,99.568
GND on Bottom Layer "Top Layer-No Net" (solid, remove dead copper, pour order 1001): 169.799,99.568 174.625,94.742 174.625,10.668 169.672,5.715 20.828,5.715 16.002,10.541 16.002,94.996 20.574,99.568

## Other copper
Top Layer:
  pour cut-out: 76.708,20.701 76.2,21.209 76.2,22.733 76.708,23.241 114.046,23.241 114.554,22.733 114.554,21.209 114.046,20.701
  pour cut-out: 132.334,49.784 137.922,49.784 138.557,49.149 138.557,44.069 137.922,43.434 132.461,43.434 131.699,44.196 131.699,49.149
  region: 131.318,43.053 131.318,36.322 131.445,36.195 131.953,36.195 132.08,36.322 132.08,38.481 133.35,39.751 133.35,43.053 132.969,43.434 131.699,43.434
  pour cut-out: 66.04,8.255 65.341,8.954 65.341,9.842 66.04,10.541 76.75,10.541 77.47,9.952 77.47,8.89 76.835,8.255
Bottom Layer:
  pour cut-out: 76.708,20.701 76.2,21.209 76.2,22.733 76.708,23.241 114.046,23.241 114.554,22.733 114.554,21.209 114.046,20.701
  pour cut-out: 66.04,8.255 65.341,8.954 65.341,9.842 66.04,10.541 76.75,10.541 77.47,9.952 77.47,8.89 76.835,8.255

## Silkscreen, mask and mechanical layers (free items; w line width, h text height)
Top Overlay:
  drawing of 694 lines, arcs and shapes, not listed
  text "RoHs" at 158.877,11.176 h4
  text "Lion VF1S Design by Aysi" at 106.51,10.604 h1
  text "MTF .inc" at 122.004,8.572 h1
Top Solder:
  region: 35.56,100.711 35.56,102.743 24.765,102.743 24.765,100.711
  region: 165.608,100.711 165.608,102.743 154.813,102.743 154.813,100.711
  rectangle: 175.768,77.089 177.8,87.884
  region: 177.8,27.94 175.768,27.94 175.768,17.145 177.8,17.145
  region: 165.481,2.54 165.481,4.572 154.686,4.572 154.686,2.54
  region: 35.56,2.54 35.56,4.572 24.765,4.572 24.765,2.54
  rectangle: 12.827,17.145 14.859,27.94
  rectangle: 12.827,77.089 14.859,87.884
  region: 131.318,41.529 131.318,37.211 131.445,37.084 131.953,37.084 132.08,37.211 132.08,38.481 133.35,39.751 133.35,41.529
Bottom Solder:
  lines w1.3: 12.319,8.89 19.177,2.032 171.196,2.032 178.308,9.144 178.308,96.393 171.45,103.251 19.05,103.251 12.319,96.52 12.319,88.011 12.319,8.89
Mechanical 1:
  circle w0.127: c5.112,92.692 r1.65
  circle w0.127: c5.112,12.692 r1.65
  circle w0.127: c185.412,92.692 r1.65
  circle w0.127: c185.412,12.692 r1.65
  lines w0.127: -0.015,7.012 ccw(c6.985,7.012) 6.985,0.012 ; -0.012,56.515 2.54,56.515 2.54,76.2 -0.012,76.2 ; 0.012,7 0.012,98.4 cw(c7.012,98.4) 7.012,105.4 ; 7,105.392 183.5,105.392 ; 7.01,-0.009 183.506,-0.009 ; 183.488,-0.015 ccw(c183.488,6.985) 190.488,6.985 ; 183.515,105.398 cw(c183.515,98.398) 190.515,98.398 ; 190.512,7 190.512,98.4
  lines w1: 12.312,17.442 12.312,22.442 12.312,27.442 ; 12.312,77.442 12.312,82.442 12.312,87.442 ; 25.162,2.091 30.162,2.091 35.162,2.091 ; 25.162,103.292 30.162,103.292 35.162,103.292 ; 155.162,2.091 160.162,2.091 165.162,2.091 ; 155.162,103.292 160.162,103.292 165.162,103.292 ; 178.312,17.442 178.312,22.442 178.312,27.442 ; 178.312,77.442 178.312,82.442 178.312,87.442
  lines w1.3: 66.421,9.398 76.381,9.398
  lines w1.8: 77.375,21.971 113.379,21.971